# EAGLE board STM32F407VGT6 v38 (EAGLE 9.7.0)
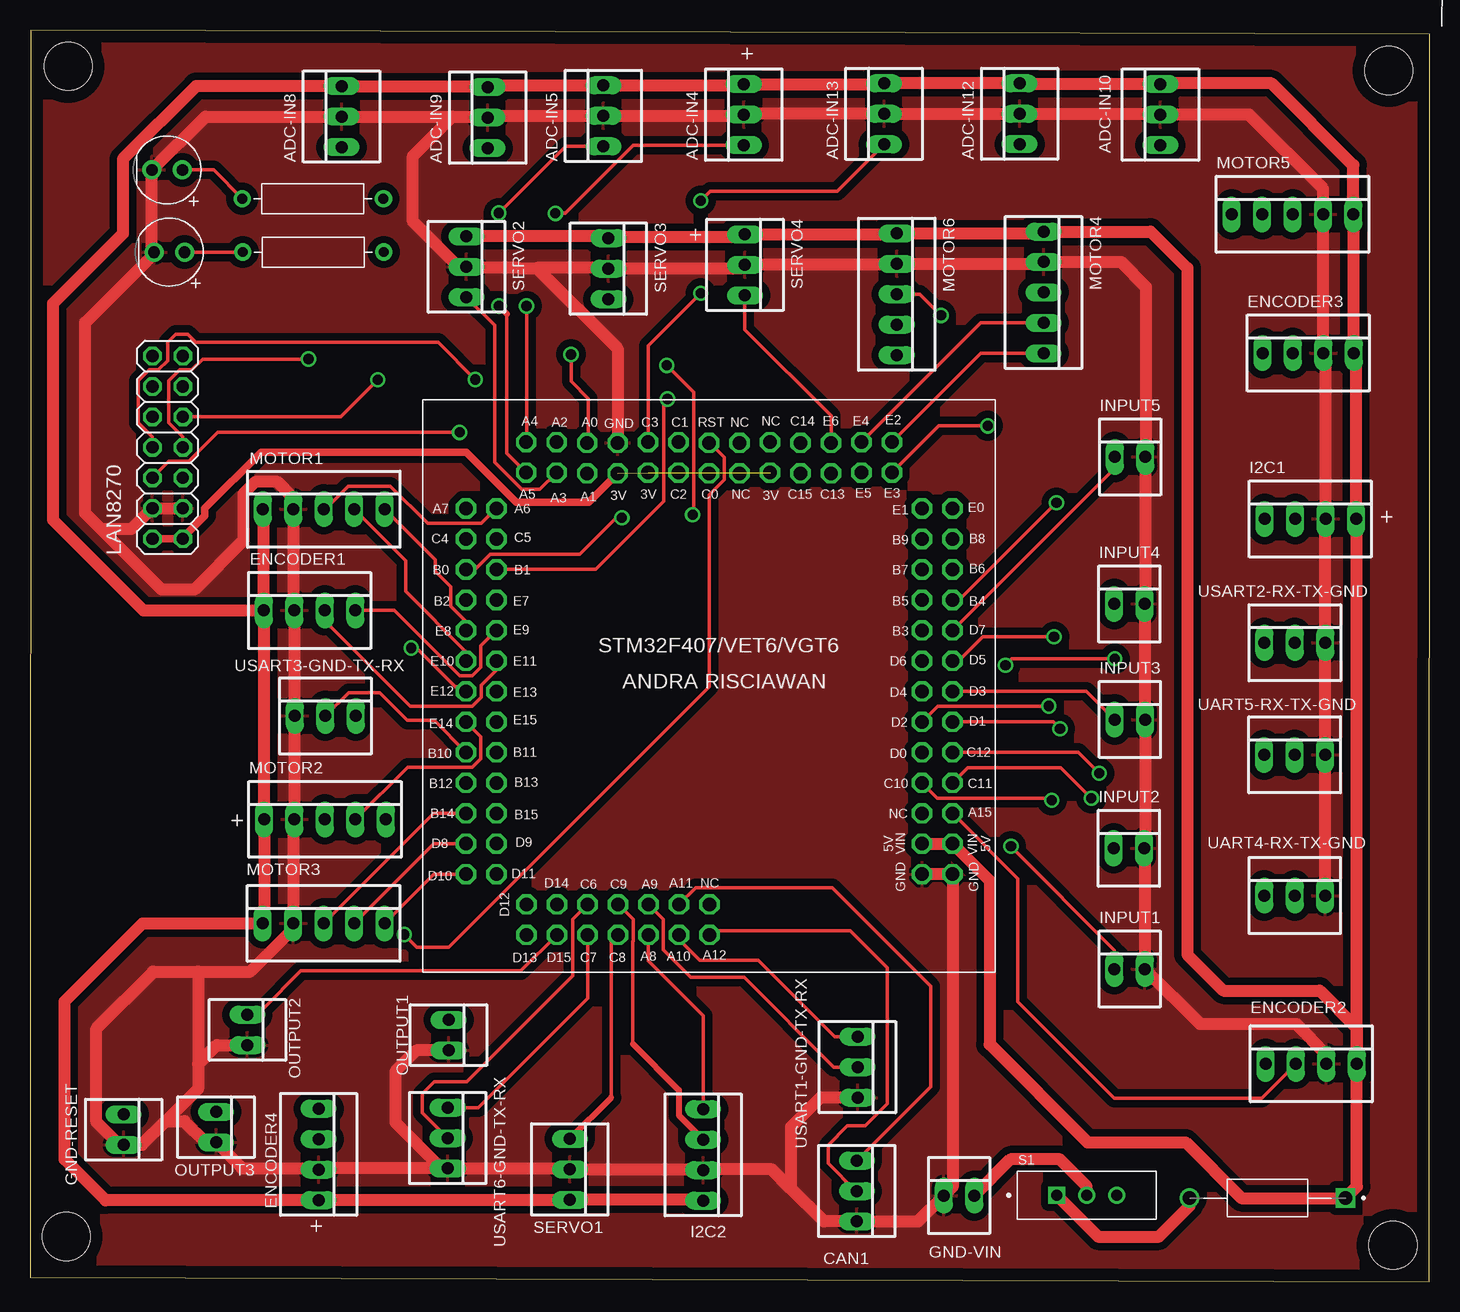
[diagram p0: board, top side]
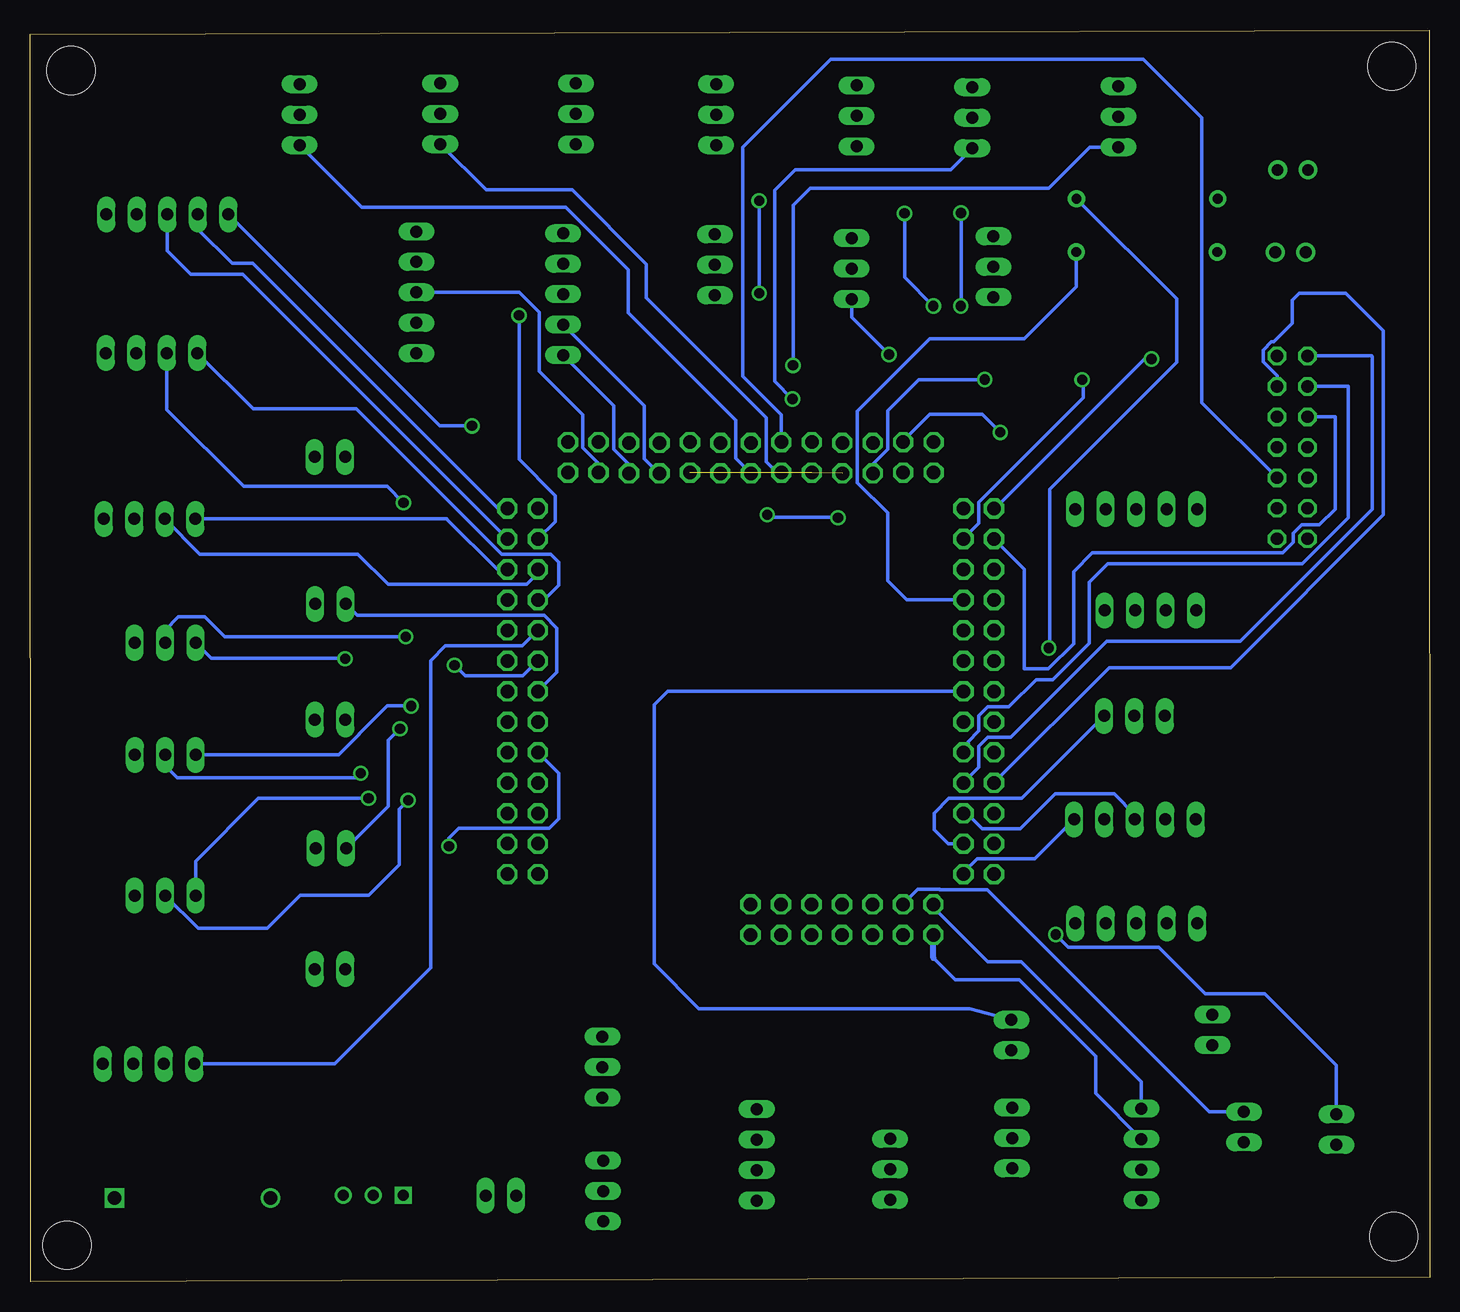
[diagram p1: board, bottom side, seen from below]

Size 116.66 x 104.31 mm. Coordinates in mm from the lower left corner, seen from the top.
Outline: 0.07,104.31 0,0.37 116.59,0 116.66,103.94 0.07,104.31
Copper layers (1*16): Top / Bottom
Stack-up Default Layer Stack: Top User Defined 0.035mm / Dielectric-1 User Defined 1.5mm / Bottom User Defined 0.035mm
Design rules: minimum copper width 0.3mm, minimum drill size 0.35mm, copper clearance wire_polygon to wire_polygon 0.6mm, copper clearance wire_polygon to pad_smd 10mil, copper clearance wire_polygon to via 10mil, copper clearance pad_smd to pad_smd 10mil, copper clearance pad_smd to via 10mil, copper clearance via to via 6mil, copper clearance smd to pad (same net) 6mil, copper clearance smd to via (same net) 6mil, copper clearance smd to smd (same net) 6mil, dimension clearance 40mil, via restrict clearance 0mil, restrict clearance 0.3mm, drill distance 0.6mm, keepout clearance 0mil
Holes 4 mm at 3.02,3.77 113.58,3.03 113.24,100.94 3.18,101.28

## Footprints (pad centres in the part's own frame; a part is rotated, then mirrored left to right if it is on the bottom)
22-23-2031 = drill 1 long: 1 -2.54,0; 2 0,0; 3 2.54,0
LEDRD254W60D565H860B_R = drill 0.981 pad 1.581: A -1.27,0; C 1.27,0
DIOAD1300W80L670D310 = drill 1.1: A 6.5,0 | drill 1.1 square: C -6.5,0
22-23-2041 = drill 1 long: 1 -3.81,0; 2 -1.27,0; 3 1.27,0; 4 3.81,0
22-23-2021 = drill 1 long: 1 -1.27,0; 2 1.27,0
2X07 = drill 1.016 octagon: 1 -7.62,-1.27; 2 -7.62,1.27; 3 -5.08,-1.27; 4 -5.08,1.27; 5 -2.54,-1.27; 6 -2.54,1.27; 7 0,-1.27; 8 0,1.27; 9 2.54,-1.27; 10 2.54,1.27; 11 5.08,-1.27; 12 5.08,1.27; 13 7.62,-1.27; 14 7.62,1.27
22-23-2051 = drill 1 long: 1 -5.08,0; 2 -2.54,0; 3 0,0; 4 2.54,0; 5 5.08,0
RESAD1176W63L850D250B = drill 0.83 pad 1.43: 1 -5.88,0; 2 5.88,0
SW_MINI-SPDT-SW = drill 0.9 square: 1 -2.5,0 | drill 0.9: 2 0,0; 3 2.5,0
STM32F4HEAD = drill 1.125 octagon: 3V1 5.08,20.32; 3V2 -5.08,20.32; 3V3 -7.62,20.27; 5V1 17.75,-10.6; 5V2 20.29,-10.6; A0 -10.16,22.81; A1 -10.16,20.27; A2 -12.7,22.86; A3 -12.7,20.32; A4 -15.24,22.86; A5 -15.24,20.32; A6 -17.72,17.34; A7 -20.26,17.34; A8 -5.05,-18.19; A9 -5.05,-15.65; A10 -2.51,-18.19; A11 -2.51,-15.65; A12 0.03,-18.19; A15 20.29,-8.06; B0 -20.26,12.26; B1 -17.72,12.26; B2 -20.26,9.72; B3 17.75,7.18; B4 20.29,9.72; B5 17.75,9.72; B6 20.29,12.26; B7 17.75,12.26; B8 20.29,14.8; B9 17.75,14.8; B10 -20.26,-2.98; B11 -17.72,-2.98; B12 -20.26,-5.52; B13 -17.72,-5.52; B14 -20.26,-8.06; B15 -17.72,-8.06; C0 0,20.27; C1 -2.54,22.86; C2 -2.54,20.32; C3 -5.08,22.86; C4 -20.26,14.8; C5 -17.72,14.8; C6 -10.13,-15.65; C7 -10.13,-18.19; C8 -7.59,-18.19; C9 -7.59,-15.65; C10 17.75,-5.52; C11 20.29,-5.52; C12 20.29,-2.98; C13 10.16,20.27; C14 7.62,22.81; C15 7.62,20.27; D0 17.75,-2.98; D1 20.29,-0.44; D2 17.75,-0.44; D3 20.29,2.1; D4 17.75,2.1; D5 20.29,4.64; D6 17.75,4.64; D7 20.29,7.18; D8 -20.26,-10.6; D9 -17.72,-10.6; D10 -20.26,-13.14; D11 -17.72,-13.14; D12 -15.21,-15.65; D13 -15.21,-18.19; D14 -12.67,-15.65; D15 -12.67,-18.19; E0 20.29,17.34; E1 17.75,17.34; E2 15.24,22.86; E3 15.24,20.32; E4 12.7,22.86; E5 12.7,20.32; E6 10.16,22.81; E7 -17.72,9.72; E8 -20.26,7.18; E9 -17.72,7.18; E10 -20.26,4.64; E11 -17.72,4.64; E12 -20.26,2.1; E13 -17.72,2.1; E14 -20.26,-0.44; E15 -17.72,-0.44; GND1 17.75,-13.14; GND2 20.29,-13.14; GND3 -7.62,22.81; NC2 0.03,-15.65; NC3 17.75,-8.06; NC4 5.08,22.86; NC5 2.54,20.27; NC6 2.54,22.81; RST 0,22.81

## Placement (x,y rotation side)
ADC-IN4  22-23-2031  [22-23-2031]  59.48,97.26 90 top
ADC-IN5  22-23-2031  [22-23-2031]  47.78,97.16 90 top
ADC-IN8  22-23-2031  [22-23-2031]  25.96,97.1 90 top
ADC-IN9  22-23-2031  [22-23-2031]  38.14,97.01 90 top
ADC-IN10  22-23-2031  [22-23-2031]  94.2,97.27 90 top
ADC-IN12  22-23-2031  [22-23-2031]  82.47,97.33 90 top
ADC-IN13  22-23-2031  [22-23-2031]  71.17,97.32 90 top
CAN1  22-23-2031  [22-23-2031]  68.9,7.56 270 top
D1  LED_RADIALRED  [LEDRD254W60D565H860B_R]  11.61,85.8 180 top
D2  LED_RADIALRED  [LEDRD254W60D565H860B_R]  11.43,92.65 180 top
D4  1N5392  [DIOAD1300W80L670D310]  103.13,6.97 180 top
ENCODER1  22-23-2041  [22-23-2041]  23.3,55.94 0 top
ENCODER2  22-23-2041  [22-23-2041]  106.77,18.16 0 top
ENCODER3  22-23-2041  [22-23-2041]  106.52,77.39 0 top
ENCODER4  22-23-2041  [22-23-2041]  24.05,10.61 270 top
GND-RESET  22-23-2021  [22-23-2021]  7.8,12.68 270 top
GND-VIN  22-23-2021  [22-23-2021]  77.42,7.18 0 top
I2C1  22-23-2041  [22-23-2041]  106.69,63.56 0 top
I2C2  22-23-2041  [22-23-2041]  56.09,10.57 270 top
INPUT1  22-23-2021  [22-23-2021]  91.64,26.06 0 top
INPUT2  22-23-2021  [22-23-2021]  91.58,36.12 0 top
INPUT3  22-23-2021  [22-23-2021]  91.65,46.85 0 top
INPUT4  22-23-2021  [22-23-2021]  91.62,56.48 0 top
INPUT5  22-23-2021  [22-23-2021]  91.68,68.73 0 top
LAN8270  PINHD-2X7  [2X07]  11.47,69.53 90 top
MOTOR1  22-23-2051  [22-23-2051]  24.48,64.38 0 top
MOTOR2  22-23-2051  [22-23-2051]  24.58,38.53 0 top
MOTOR3  22-23-2051  [22-23-2051]  24.46,29.86 0 top
MOTOR4  22-23-2051  [22-23-2051]  84.46,82.44 270 top
MOTOR5  22-23-2051  [22-23-2051]  105.21,88.95 0 top
MOTOR6  22-23-2051  [22-23-2051]  72.23,82.29 270 top
OUTPUT1  22-23-2021  [22-23-2021]  34.88,20.55 270 top
OUTPUT2  22-23-2021  [22-23-2021]  18.12,20.99 270 top
OUTPUT3  22-23-2021  [22-23-2021]  15.5,12.88 270 top
R1  [RESAD1176W63L850D250B]  23.6,85.81 180 top
R2  [RESAD1176W63L850D250B]  23.57,90.25 180 top
S1  MINI-SPDT-SW  [SW_MINI-SPDT-SW]  88.06,7.21 0 top
SERVO1  22-23-2031  [22-23-2031]  44.99,9.37 270 top
SERVO2  22-23-2031  [22-23-2031]  36.37,84.58 270 top
SERVO3  22-23-2031  [22-23-2031]  48.2,84.42 270 top
SERVO4  22-23-2031  [22-23-2031]  59.58,84.74 270 top
U$1  [STM32F4HEAD]  56.59,47.1 0 top
UART4-RX-TX-GND  22-23-2031  [22-23-2031]  105.4,32.18 0 top
UART5-RX-TX-GND  22-23-2031  [22-23-2031]  105.39,43.91 0 top
USART1-GND-TX-RX  22-23-2031  [22-23-2031]  68.96,17.89 270 top
USART2-RX-TX-GND  22-23-2031  [22-23-2031]  105.4,53.25 0 top
USART3-GND-TX-RX  22-23-2031  [22-23-2031]  24.62,47.15 0 top
USART6-GND-TX-RX  22-23-2031  [22-23-2031]  34.81,11.98 270 top

## Library data of the parts
ADC-IN4 ADC-IN5 ADC-IN8-ADC-IN10 ADC-IN12 ADC-IN13 CAN1 SERVO1-SERVO4 UART4-RX-TX-GND UART5-RX-TX-GND USART1-GND-TX-RX USART2-RX-TX-GND USART3-GND-TX-RX USART6-GND-TX-RX = con-molex; MF: MOLEX; MPN: 22-23-2031; OC_FARNELL: 1462950; OC_NEWARK: 30C0862
D1 D2 = Opto-Electronic
D4 = 1N5392; AVAILABILITY: In Stock; CHECK_PRICES: https://www.snapeda.com/parts/1N5392/Onsemi/view-part/?ref=eda; DESCRIPTION: Diode 100 V 1.5A Through Hole DO-15; MF: onsemi; MP: 1N5392; PACKAGE: None; PRICE: None; SNAPEDA_LINK: https://www.snapeda.com/parts/1N5392/Onsemi/view-part/?ref=snap
ENCODER1-ENCODER4 I2C1 I2C2 = con-molex; MF: MOLEX; MPN: 22-23-2041; OC_FARNELL: 1462920; OC_NEWARK: 38C0355
GND-RESET GND-VIN INPUT1-INPUT5 OUTPUT1-OUTPUT3 = con-molex; MF: MOLEX; MPN: 22-23-2021; OC_FARNELL: 1462926; OC_NEWARK: 25C3832
LAN8270 = Connector; CATEGORY: Headers; DESCRIPTION: Header, Straight, 2x7 Position; MANUFACTURER: Generic; MPN: Generic; OPERATING_TEMPERATURE: Generic; PART_STATUS: Active; PITCH: 0.100" (2.54mm); ROHS_COMPLIANCE: Generic; SERIES: Generic; SUB-CATEGORY: Headers, Male Pins; TYPE: Board to Board or Cable, Unshrouded, Through Hole, Straight
MOTOR1-MOTOR6 = con-molex; MF: MOLEX; MPN: 22-23-2051; OC_FARNELL: 1462952; OC_NEWARK: 38C9178
R1 R2 = Resistor; CATEGORY: Resistor; SUB-CATEGORY: Fixed
S1 = MINI-SPDT-SW; AVAILABILITY: Not in stock; CHECK_PRICES: https://www.snapeda.com/parts/MINI-SPDT-SW/Gravitech/view-part/?ref=eda; DESCRIPTION: Slide Switches MINI SPDT SWITCH; MF: Gravitech; MP: MINI-SPDT-SW; PACKAGE: None; PRICE: None; SNAPEDA_LINK: https://www.snapeda.com/parts/MINI-SPDT-SW/Gravitech/view-part/?ref=snap
U$1 = stm32header

## Nets
3V3: LAN8270.1 LAN8270.2 U$1.3V1 U$1.3V2 U$1.3V3
5V: ADC-IN4.3 ADC-IN5.3 ADC-IN8.3 ADC-IN9.3 ADC-IN10.3 ADC-IN12.3 ADC-IN13.3 D4.C ENCODER1.1 ENCODER2.4 ENCODER3.4 ENCODER4.4 I2C1.4 I2C2.4 MOTOR1.1 MOTOR2.1 MOTOR3.1 MOTOR4.1 MOTOR5.5 MOTOR6.1 SERVO1.3 SERVO2.1 SERVO3.1 SERVO4.1 U$1.5V1 U$1.5V2
CRS_DV: LAN8270.7 U$1.A7
GND: ADC-IN4.2 ADC-IN5.2 ADC-IN8.2 ADC-IN9.2 ADC-IN10.2 ADC-IN12.2 ADC-IN13.2 CAN1.3 D1.C D2.C ENCODER1.2 ENCODER2.3 ENCODER3.3 ENCODER4.3 GND-RESET.2 GND-VIN.1 I2C1.3 I2C2.3 INPUT1.2 INPUT2.2 INPUT3.2 INPUT4.2 INPUT5.2 LAN8270.3 LAN8270.4 MOTOR1.2 MOTOR2.2 MOTOR3.2 MOTOR4.2 MOTOR5.4 MOTOR6.2 OUTPUT1.2 OUTPUT2.2 OUTPUT3.2 SERVO1.2 SERVO2.2 SERVO3.2 SERVO4.2 U$1.GND1 U$1.GND2 U$1.GND3 UART4-RX-TX-GND.3 UART5-RX-TX-GND.3 USART1-GND-TX-RX.3 USART2-RX-TX-GND.3 USART3-GND-TX-RX.1 USART6-GND-TX-RX.3
MDC: LAN8270.5 U$1.C1
MDIO: LAN8270.6 U$1.A2
N$4: D4.A S1.1
N$5: GND-VIN.2 S1.2
N$17: D1.A R1.2
N$18: D2.A R2.2
NC: LAN8270.13
PA0: SERVO3.3 U$1.A0
PA3: SERVO2.3 U$1.A3
PA4: ADC-IN4.1 U$1.A4
PA5: ADC-IN5.1 U$1.A5
PA6: MOTOR1.3 U$1.A6
PA9: U$1.A9 USART1-GND-TX-RX.2
PA10: U$1.A10 USART1-GND-TX-RX.1
PA15: ENCODER2.2 U$1.A15
PB0: ADC-IN8.1 U$1.B0
PB1: ADC-IN9.1 U$1.B1
PB3: ENCODER2.1 U$1.B3
PB4: ENCODER3.2 U$1.B4
PB5: ENCODER3.1 U$1.B5
PB8: MOTOR5.3 U$1.B8
PB9: MOTOR6.3 U$1.B9
PB10: U$1.B10 USART3-GND-TX-RX.2
PB14: MOTOR3.3 U$1.B14
PB15: MOTOR2.3 U$1.B15
PC0: ADC-IN10.1 U$1.C0
PC2: ADC-IN12.1 U$1.C2
PC3: ADC-IN13.1 U$1.C3
PC6: U$1.C6 USART6-GND-TX-RX.2
PC7: U$1.C7 USART6-GND-TX-RX.1
PC8: SERVO1.1 U$1.C8
PC10: U$1.C10 UART4-RX-TX-GND.2
PC11: U$1.C11 UART4-RX-TX-GND.1
PC12: U$1.C12 UART5-RX-TX-GND.2
PC13: MOTOR6.5 U$1.C13
PC15: MOTOR6.4 U$1.C15
PD0: INPUT1.1 U$1.D0
PD1: INPUT2.1 U$1.D1
PD2: U$1.D2 UART5-RX-TX-GND.1
PD3: INPUT3.1 U$1.D3
PD4: INPUT4.1 U$1.D4
PD5: U$1.D5 USART2-RX-TX-GND.2
PD6: U$1.D6 USART2-RX-TX-GND.1
PD7: INPUT5.1 U$1.D7
PD8: MOTOR3.4 U$1.D8
PD9: U$1.D9 USART3-GND-TX-RX.3
PD10: MOTOR3.5 U$1.D10
PD11: MOTOR2.5 U$1.D11
PD12: ENCODER4.1 U$1.D12
PD13: ENCODER4.2 U$1.D13
PD14: OUTPUT3.1 U$1.D14
PD15: OUTPUT2.1 U$1.D15
PE0: MOTOR5.2 U$1.E0
PE2: MOTOR4.5 U$1.E2
PE3: MOTOR5.1 U$1.E3
PE4: MOTOR4.4 U$1.E4
PE5: MOTOR4.3 U$1.E5
PE6: SERVO4.3 U$1.E6
PE7: R1.1 U$1.E7
PE8: MOTOR1.5 U$1.E8
PE9: ENCODER1.4 U$1.E9
PE10: MOTOR1.4 U$1.E10
PE11: ENCODER1.3 U$1.E11
PE12: R2.1 U$1.E12
PE13: OUTPUT1.1 U$1.E13
PE14: MOTOR2.4 U$1.E14
PE15: U$1.E15
REF_CLK: LAN8270.8 U$1.A1
RST: GND-RESET.1 U$1.RST
RX1: CAN1.1 U$1.A11
RXD0: LAN8270.10 U$1.C4
RXD1: LAN8270.9 U$1.C5
SCL1: I2C1.1 U$1.B6
SCL2: I2C2.1 U$1.A8
SDA1: I2C1.2 U$1.B7
SDA2: I2C2.2 U$1.C9
TX1: CAN1.2 U$1.A12
TX_EN: LAN8270.12 U$1.B11
TXD0: LAN8270.11 U$1.B12
TXD1: LAN8270.14 U$1.B13

## Tracks (layer width: path | path; a pad name or v marks a point on that pad's centre or on a via)
3V3  (2 unrouted)
  Top 0.61: LAN8270.2 LAN8270.1 12.74,62.01 14.57,63.84 14.57,64.45 19.26,69.13 36.35,69.13 40.52,64.96 46.49,64.96 46.5,64.98 46.58,64.98 U$1.3V3
5V
  Top 0.305: 110.58,63.48 I2C1.4
  Top 1.016: U$1.5V1 U$1.5V2 79.96,33.42 79.96,19.77 88.11,11.62 96.31,11.62 100.96,6.97 D4.C 110.58,7.93 ENCODER2.4 | SERVO2.1 48.04,87.12 SERVO3.1 48.3,87.06 59.36,87.06 SERVO4.1 72.14,87.28 MOTOR6.1 84.31,87.37 MOTOR4.1 93.38,87.52 96.44,84.46 96.44,27.26 99.44,24.26 107.46,24.26 110.58,21.14 ENCODER2.4 | I2C2.4 56.03,6.83 SERVO1.3 44.96,6.8 ENCODER4.4 24.03,6.78 6.3,6.78 2.88,10.2 2.88,23.36 9.38,29.86 MOTOR3.1 19.5,29.98 MOTOR2.1 ENCODER1.1 | I2C1.4 110.5,77.22 ENCODER3.4 110.29,77.43 MOTOR5.5 110.29,93.05 103.47,99.87 94.27,99.87 ADC-IN10.3 82.53,99.81 ADC-IN12.3 ADC-IN13.3 71.11,99.81 ADC-IN4.3 59.38,99.7 ADC-IN5.3 38.29,99.7 ADC-IN9.3 38.05,99.64 ADC-IN8.3 13.84,99.64 7.74,93.54 7.74,87.35 1.9,81.51 1.9,63.48 9.44,55.94 ENCODER1.1 | ENCODER2.4 110.58,63.48 | MOTOR1.1 19.49,64.29 ENCODER1.1
CRS_DV  (via drill 0.85)
  Top 0.305: v23.2,76.89 14.41,76.89 13.5,75.98 12.46,75.98 11.57,75.09 11.57,71.58 12.74,70.42 LAN8270.7
  Bottom 0.305: U$1.A7 36.24,64.44 23.79,76.89 v23.2,76.89
GND
  Top 1.016: 42.28,84.47 40.76,84.47 40.75,84.48 36.47,84.48 SERVO2.2 35.68,84.58 31.9,88.36 31.9,93.81 35.19,97.1 | U$1.GND3 48.97,77.78 42.28,84.47 | 42.28,84.47 42.26,84.49 48.13,84.49 SERVO3.2 48.25,84.47 59.31,84.47 SERVO4.2 72.14,84.74 MOTOR6.2 84.31,84.83 MOTOR4.2 90.9,84.98 92.99,82.89 92.99,68.77 INPUT5.2 92.95,56.54 INPUT4.2 92.89,46.88 INPUT3.2 92.92,36.19 INPUT2.2 92.91,36.05 INPUT1.2 97.51,21.46 105.55,21.46 108.04,18.97 ENCODER2.3 | 35.19,97.1 ADC-IN8.2 14.61,97.1 D2.C 10.16,85.98 D1.C 10.34,85.66 4.6,79.92 4.6,64.05 5.89,62.77 | 35.19,97.1 38.05,97.1 ADC-IN9.2 38.29,97.16 ADC-IN5.2 59.38,97.16 ADC-IN4.2 59.54,97.33 ADC-IN13.2 ADC-IN12.2 94.14,97.33 ADC-IN10.2 101.56,97.27 107.75,91.08 MOTOR5.4 107.79,88.91 ENCODER3.3 107.96,77.22 I2C1.3 107.94,63.54 USART2-RX-TX-GND.3 107.93,53.24 UART5-RX-TX-GND.3 UART4-RX-TX-GND.3 | U$1.GND1 U$1.GND2 76.88,7.91 GND-VIN.1 73.99,5.02 CAN1.3 66.16,5.02 63.41,7.77 | 56.03,9.37 SERVO1.2 44.92,9.44 USART6-GND-TX-RX.3 | 56.03,9.37 I2C2.3 | USART6-GND-TX-RX.3 34.29,9.44 30.44,13.29 30.44,17.53 32.19,19.28 OUTPUT1.2 | USART6-GND-TX-RX.3 24.15,9.44 | 24.15,9.44 ENCODER4.3 | 63.41,7.77 61.81,9.37 56.03,9.37 | USART1-GND-TX-RX.3 65.87,15.35 63.41,12.89 63.41,7.77 | 14,25.84 10.26,25.84 5.53,21.11 5.53,13.32 7.44,11.41 GND-RESET.2 9.33,11.41 11.3,13.38 | 14,25.84 18.34,25.84 21.92,29.42 MOTOR3.2 21.92,38.41 MOTOR2.2 22.04,47.11 USART3-GND-TX-RX.1 22.03,47.2 ENCODER1.2 21.94,56.03 MOTOR1.2 21.94,65.34 20.63,66.65 18.77,66.65 17.78,65.66 17.78,61.8 13.67,57.68 10.97,57.68 5.89,62.77 | 5.89,62.77 8.52,62.77 LAN8270.4 LAN8270.3
  Top 1.016: 14,18.14 15.58,19.72 OUTPUT2.2 | 14,25.84 14,18.14 | 24.15,9.44 17.67,9.44 OUTPUT3.2 14.64,11.61 12.87,13.38 11.3,13.38 | 14,18.14 14,16.08 11.3,13.38
  pour Top (isolate 0.61): 0.31,103.13 120.6,103.13 120.6,-0.62 0.31,-0.62
MDC
  Bottom 0.305: U$1.C1 54.05,72.23 57.27,75.45 57.27,94.54 49.93,101.88 23.9,101.88 19,96.98 19,73.25 LAN8270.5
MDIO  (via drill 0.85)
  Top 0.305: LAN8270.6 11.57,68.36 13.23,68.36 15.65,70.78 v35.8,70.78
  Bottom 0.305: v35.8,70.78 37.3,72.28 41.7,72.28 43.89,70.09 U$1.A2
N$4
  Top 1.016: S1.1 89.01,3.76 94.07,3.76 96.63,6.32 D4.A
N$5
  Top 1.016: GND-VIN.2 81.7,10.19 85.82,10.19 88.06,7.95 S1.2
N$17
  Top 0.305: D1.A R1.2
N$18
  Top 0.305: D2.A 15.3,92.65 R2.2
PA0  (via drill 0.85)
  Top 0.305: 46.54,70.02 46.54,73.59 45.09,75.05 v45.09,77.28
  Top 0.508: 46.54,70.02 U$1.A0
  Bottom 0.305: SERVO3.3 48.2,80.39 v45.09,77.28
PA3
  Top 0.305: U$1.A3 42.49,66.02 40.98,66.02 38.72,68.28 38.72,79.69 SERVO2.3
PA4  (via drill 0.85)
  Top 0.305: v41.38,81.31 41.38,69.99 | v43.78,89.03 44.59,89.03 50.28,94.73 ADC-IN4.1
  Top 0.508: 41.38,69.99 U$1.A4
  Bottom 0.305: v43.78,89.03 43.78,83.71 v41.38,81.31
PA5  (via drill 0.85)
  Top 0.305: ADC-IN5.1 44.63,94.62 v39.07,89.06 | U$1.A5 39.74,69.03 39.74,80.66
  Top 0.508: v39.09,81.31 39.74,80.66
  Bottom 0.305: v39.07,89.06 39.07,81.33 v39.09,81.31
PA6
  Top 0.305: MOTOR1.3 24.62,64.38 26.54,66.29 30.04,66.29 33.15,63.19 37.62,63.19 U$1.A6
PA9
  Top 0.305: U$1.A9 52.79,30.2 52.79,27.65 55.08,25.36 59.5,25.36 66.97,17.89 USART1-GND-TX-RX.2
PA10
  Top 0.305: U$1.A10 54.08,28.54 55.81,26.81 60.68,26.81 67.06,20.43 USART1-GND-TX-RX.1
PA15
  Top 0.305: ENCODER2.2 102.63,15.29 90.36,15.29 82.32,23.33 82.32,33.6 U$1.A15
PB0  (via drill 0.85)
  Top 0.305: v53.07,76.36 55.3,74.13 55.3,63.99 | U$1.B0 37.1,59.36 38.35,60.61 45.8,60.61 48.86,63.67 v49.32,63.67
  Top 0.508: 55.3,63.99 v55.22,63.91
  Bottom 0.305: ADC-IN8.1 28.35,94.56 31.78,91.13 51.64,91.13 53.07,89.7 v53.07,76.36 | v55.22,63.91 55.01,63.7 49.36,63.7 v49.32,63.67
PB1  (via drill 0.85)
  Top 0.305: v53.12,73.56 52.8,73.24 52.8,65.03 47.13,59.36 U$1.B1
  Bottom 0.305: ADC-IN9.1 39.93,92.68 52.89,92.68 54.61,90.96 54.61,75.05 v53.12,73.56
PB3
  Bottom 0.305: ENCODER2.1 91.27,18.16 83.28,26.15 83.28,51.76 82.05,52.99 75.63,52.99 U$1.B3
PB4  (via drill 0.85)
  Top 0.305: U$1.B4 77.43,56.82 85.52,64.91 v85.54,64.91
  Bottom 0.305: v85.54,64.91 86.91,66.28 98.86,66.28 105.25,72.67 ENCODER3.2
PB5
  Bottom 0.305: ENCODER3.1 98.05,72.73 89.48,72.73 77.36,60.61 73.27,60.61 72.6,59.94 72.6,58.03 73.81,56.82 U$1.B5
PB8
  Bottom 0.305: U$1.B8 98.94,83.96 103.25,83.96 105.21,85.92 MOTOR5.3
PB9  (via drill 0.85)
  Top 0.305: MOTOR6.3 74.14,82.29 v75.9,80.53
  Top 0.508: v75.9,80.53 v75.91,80.53
  Bottom 0.305: v75.91,80.53 75.91,68.52 72.9,65.51 72.9,63.34 U$1.B9
PB10
  Top 0.305: U$1.B10 33.67,46.78 31.43,46.78 29.12,49.08 26.55,49.08 USART3-GND-TX-RX.2
PB14
  Top 0.305: U$1.B14 33.64,39.04 MOTOR3.3
PB15
  Bottom 0.305: U$1.B15 38.6,39.04 37.31,37.75 34.14,37.75 31.24,40.64 26.29,40.64 24.58,38.93 MOTOR2.3
PC0
  Bottom 0.305: ADC-IN10.1 89.03,89.55 72.02,89.55 66.79,84.33 66.79,80.73 57.84,71.78 57.84,68.62 U$1.C0
PC2
  Bottom 0.305: ADC-IN12.1 78.66,90.98 71.48,90.98 65.31,84.81 65.31,82 55.32,72.01 55.32,68.33 54.41,67.42 U$1.C2
PC3  (via drill 0.85)
  Top 0.305: v55.9,82.37 51.51,77.99 U$1.C3 | ADC-IN13.1 67.26,90.88 56.7,90.88 v55.9,90.08
  Bottom 0.305: v55.9,90.08 v55.9,82.38 v55.9,82.37
PC6
  Top 0.305: U$1.C6 45.21,30.2 45.21,25.48 36.41,16.68 33.7,16.68 32.7,15.68 32.7,14.09 USART6-GND-TX-RX.2
PC7
  Top 0.305: U$1.C7 46.46,23.63 37.35,14.52 USART6-GND-TX-RX.1
PC8
  Top 0.305: U$1.C8 48.42,28.33 48.42,15.34
  Top 0.508: 48.42,15.34 SERVO1.1
PC10  (via drill 0.85)
  Top 0.305: v85.15,40.13 84.99,40.29 75.59,40.29 74.34,41.54 U$1.C10
  Bottom 0.305: UART4-RX-TX-GND.2 102.65,29.44 96.89,29.44 94.13,32.2 88.43,32.2 85.9,34.73 85.9,39.38 v85.15,40.13
PC11  (via drill 0.85)
  Top 0.305: v88.45,40.29 85.91,42.83 78.13,42.83 U$1.C11
  Bottom 0.305: UART4-RX-TX-GND.1 102.86,35.05 97.62,40.29 v88.45,40.29
PC12  (via drill 0.85)
  Top 0.305: v89.1,42.38 87.36,44.12 U$1.C12
  Bottom 0.305: v89.1,42.38 89.48,42 104.38,42 105.39,43.01 UART5-RX-TX-GND.2
PC13
  Bottom 0.305: U$1.C13 66.75,68.14 68,69.39 68,72.98 MOTOR6.5
PC15
  Bottom 0.305: U$1.C15 64.25,67.37 65.46,68.58 65.46,72.98 MOTOR6.4
PD0  (via drill 0.85)
  Top 0.305: INPUT1.1 90.38,27.61 81.75,36.24 v81.75,36.29
  Bottom 0.305: U$1.D0 72.58,42.36 72.58,38.58 73.37,37.79 80.92,37.79 81.75,36.96 v81.75,36.29
PD1  (via drill 0.85)
  Top 0.305: v85.83,46.08 85.26,46.65 U$1.D1
  Top 0.508: U$1.D1
  Bottom 0.305: INPUT2.1 86.8,39.63 86.8,45.11 v85.83,46.08
PD2  (via drill 0.85)
  Top 0.305: v84.9,47.98 84.87,47.95 75.63,47.95 U$1.D2
  Bottom 0.305: UART5-RX-TX-GND.1 90.93,43.91 89.22,45.62 89.22,45.66 86.9,47.98 v84.9,47.98
PD3
  Top 0.305: INPUT3.1 88.03,49.2 U$1.D3
PD4
  Bottom 0.305: U$1.D4 72.76,50.78 72.76,54.47 73.82,55.53 89.4,55.53 INPUT4.1
PD5  (via drill 0.85)
  Top 0.305: U$1.D5 77.4,51.74 79.41,53.75 v85.34,53.75
  Bottom 0.305: USART2-RX-TX-GND.2 105.4,54.31 104.29,55.42 102.11,55.42 100.44,53.75 v85.34,53.75
PD6  (via drill 0.85)
  Top 0.305: v81.29,51.37 81.83,51.91 v90.4,51.91
  Bottom 0.305: v90.4,51.91 90.43,51.94 101.55,51.94 USART2-RX-TX-GND.1 | U$1.D6 75.59,50.49 80.41,50.49 v81.29,51.37
PD7
  Top 0.305: U$1.D7 90.41,67.81 INPUT5.1
PD8
  Top 0.305: MOTOR3.4 33.64,36.5 U$1.D8
PD9
  Bottom 0.305: USART3-GND-TX-RX.3 34.02,40.29 40.09,40.29 41.32,39.06 41.32,37.67 40.15,36.5 U$1.D9
PD10
  Top 0.305: MOTOR3.5 33.64,33.96 U$1.D10
PD11
  Bottom 0.305: U$1.D11 38.87,34.12 37.74,35.25 32.94,35.25 MOTOR2.5
PD12
  Bottom 0.305: 41.38,31.2 36.84,26.66 34.05,26.66 24.05,16.66 ENCODER4.1
  Bottom 0.508: 41.38,31.2 U$1.D12
PD13
  Bottom 0.305: 41.38,26.99 39.54,25.15 34.21,25.15 27.86,18.8 27.86,15.69 ENCODER4.2
  Bottom 0.508: 41.38,26.99 U$1.D13
PD14
  Bottom 0.305: U$1.D14 42.67,32.7 40.86,32.7 40.84,32.68 36.9,32.68 18.37,14.15 OUTPUT3.1
PD15
  Top 0.305: OUTPUT2.1 19.39,22.71 22.58,25.9 40.91,25.9 U$1.D15
PE0
  Bottom 0.305: MOTOR5.2 102.67,87.71 99.82,84.87 98.11,84.87 77.68,64.44 U$1.E0
PE2
  Top 0.305: U$1.E2 79.23,77.36 MOTOR4.5
PE3  (via drill 0.85)
  Top 0.305: U$1.E3 75.73,71.32 v79.82,71.32
  Bottom 0.305: MOTOR5.1 82.5,71.32 v79.82,71.32
PE4
  Top 0.305: U$1.E4 79.23,79.9 MOTOR4.4
PE5
  Bottom 0.305: MOTOR4.3 75.88,82.44 74.21,80.77 74.21,75.87 70.58,72.24 70.58,69.48 69.29,68.19 U$1.E5
PE6
  Top 0.305: U$1.E6 66.75,72.16 59.58,79.33 SERVO4.3
PE7
  Bottom 0.305: U$1.E7 38.88,56.83 43.6,56.83 45.2,58.43 45.2,64.08 47.72,66.6 47.72,72.56 41.7,78.58 33.8,78.58 29.48,82.9 R1.1
PE8
  Top 0.305: MOTOR1.5 33.76,60.18 33.76,59.22 35.08,57.9 35.08,56.3 36.33,55.05 U$1.E8
PE9
  Top 0.305: U$1.E9 37.58,52.99 37.58,51.22 36.85,50.49 35.81,50.49 30.36,55.94 ENCODER1.4
PE10
  Top 0.305: U$1.E10 36.33,52.51 31.32,57.52 31.32,60.08 MOTOR1.4
PE11
  Top 0.305: U$1.E11 38.87,50.97 37.62,49.72 37.62,48.72 36.85,47.95 31.71,47.95 24.57,55.09 ENCODER1.3
PE12  (via drill 0.85)
  Top 0.305: U$1.E12 35.95,49.58 35.44,49.58 32.2,52.82 v31.77,52.82
  Bottom 0.305: v31.77,52.82 31.69,52.89 31.69,66.05 21.11,76.63 21.11,81.91 R2.1
PE13
  Bottom 0.305: OUTPUT1.1 38.36,22.76 60.92,22.76 64.66,26.5 64.66,48.07 63.53,49.2 U$1.E13
PE14
  Top 0.305: U$1.E14 37.58,45.41 37.58,43.6 36.85,42.87 31.46,42.87 MOTOR2.4
REF_CLK  (via drill 0.85)
  Top 0.305: v37.1,75.18 34,78.28 13.82,78.28 13.12,78.98 12.16,78.98 11.47,78.29 11.47,76.77 10.69,75.98 9.92,75.98 9.03,75.09 9.03,71.58 10.2,70.42 LAN8270.8
  Bottom 0.305: v37.1,75.18 42.6,75.18 45.18,72.6 45.18,69.39 46.43,68.14 U$1.A1
RST  (via drill 0.85)
  Top 0.305: U$1.RST 56.62,69.91 57.84,68.69 57.84,66.85 56.59,65.6 56.59,49.57 34.9,27.88 32.24,27.88 v31.19,28.93
  Bottom 0.305: GND-RESET.1 7.8,18.04 13.77,24 18.71,24 22.59,27.88 30.13,27.88 v31.19,28.93
RX1
  Top 0.305: U$1.A11 55.48,32.85 66.85,32.85 75.06,24.64 75.06,16.26 CAN1.1
RXD0
  Bottom 0.305: LAN8270.10 7.9,72.07 7.9,64.38 9.2,63.08 10.69,63.08 11.37,62.39 11.37,61.63 12.26,60.74 28.14,60.74 29.7,59.18 29.7,53.18 31.8,51.08 33.8,51.08 33.8,59.37 U$1.C4
RXD1  (via drill 0.85 pad 0.85)
  Top 0.305: v28.98,75.16 25.89,72.07 LAN8270.9
  Bottom 0.305: U$1.C5 37.58,63.19 37.58,64.96 28.88,73.66 28.88,75.06 v28.98,75.16
SCL1
  Bottom 0.305: I2C1.1 81.94,63.56 81.92,63.55 77.74,59.36 U$1.B6
SCL2
  Top 0.305: U$1.A8 51.52,28.89 51.52,26.75 56.1,22.17 I2C2.1
SDA1
  Bottom 0.305: I2C1.2 102.5,60.64 89.34,60.64 86.81,58.11 75.27,58.11 74.34,59.04 U$1.B7
SDA2
  Top 0.305: 50.23,19.82 50.23,28.37 50.25,28.39 50.25,30.2 U$1.C9
  Top 0.508: I2C2.2 54.08,13.86 54.08,15.97 50.23,19.82
TX1
  Top 0.305: 56.94,29.23 68.36,29.23 71.44,26.15 71.44,14.82 69.6,12.98 68.1,12.98 66.5,11.38 66.5,9.88 68.82,7.56 CAN1.2
  Top 0.508: 56.94,29.23 U$1.A12
TX_EN
  Bottom 0.305: U$1.B11 38.48,44.5 38.48,45.01 37.58,45.92 37.58,47.18 36.85,47.91 35.08,47.91 32.81,50.17 31.43,50.17 28.4,53.2 28.4,58.28 26.84,59.84 10.62,59.84 6.8,63.66 6.8,74.61 LAN8270.12
TXD0
  Bottom 0.305: U$1.B12 26.73,51.18 16.6,51.18 3.89,63.89 3.89,79.27 7,82.38 10.9,82.38 11.47,81.81 11.47,79.86 13.02,78.32 13.23,78.32 13.91,77.63 13.91,76.66 12.74,75.5 LAN8270.11
TXD1
  Bottom 0.305: U$1.B13 37.58,42.87 37.58,44.64 36.85,45.37 34.95,45.37 26.94,53.38 15.8,53.38 4.79,64.39 4.79,77.07 4.87,77.15 LAN8270.14

## Text on the board
SilkscreenTop: + | + | + | + | +